# Altium PCB Dionysus LCD PMOD.PcbDoc
Units mil, origin at the board's own origin, x right, y up, seen from the top; angles counter-clockwise.
Board outline 4700.07 x 2700 mil, 4 copper layers (Component Side, V3P3 Plane, Ground Plane, Solder Side); 67 components, 66 nets, 348 pads, 156 vias.
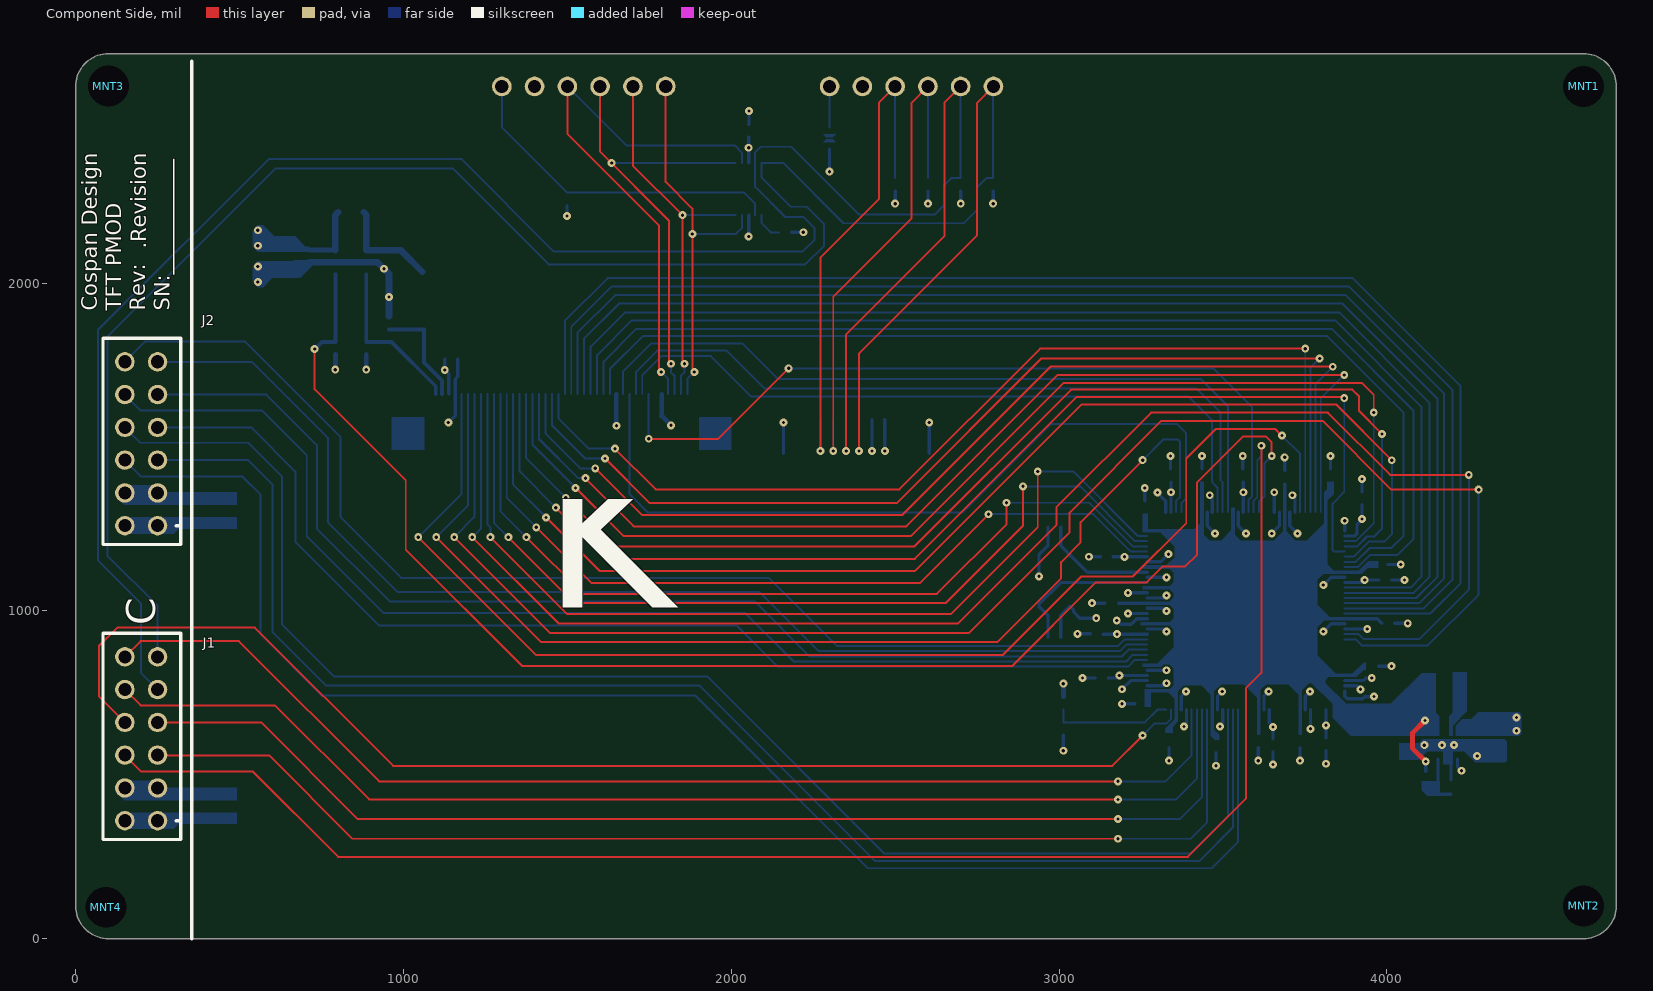
[diagram p0: Component Side view]
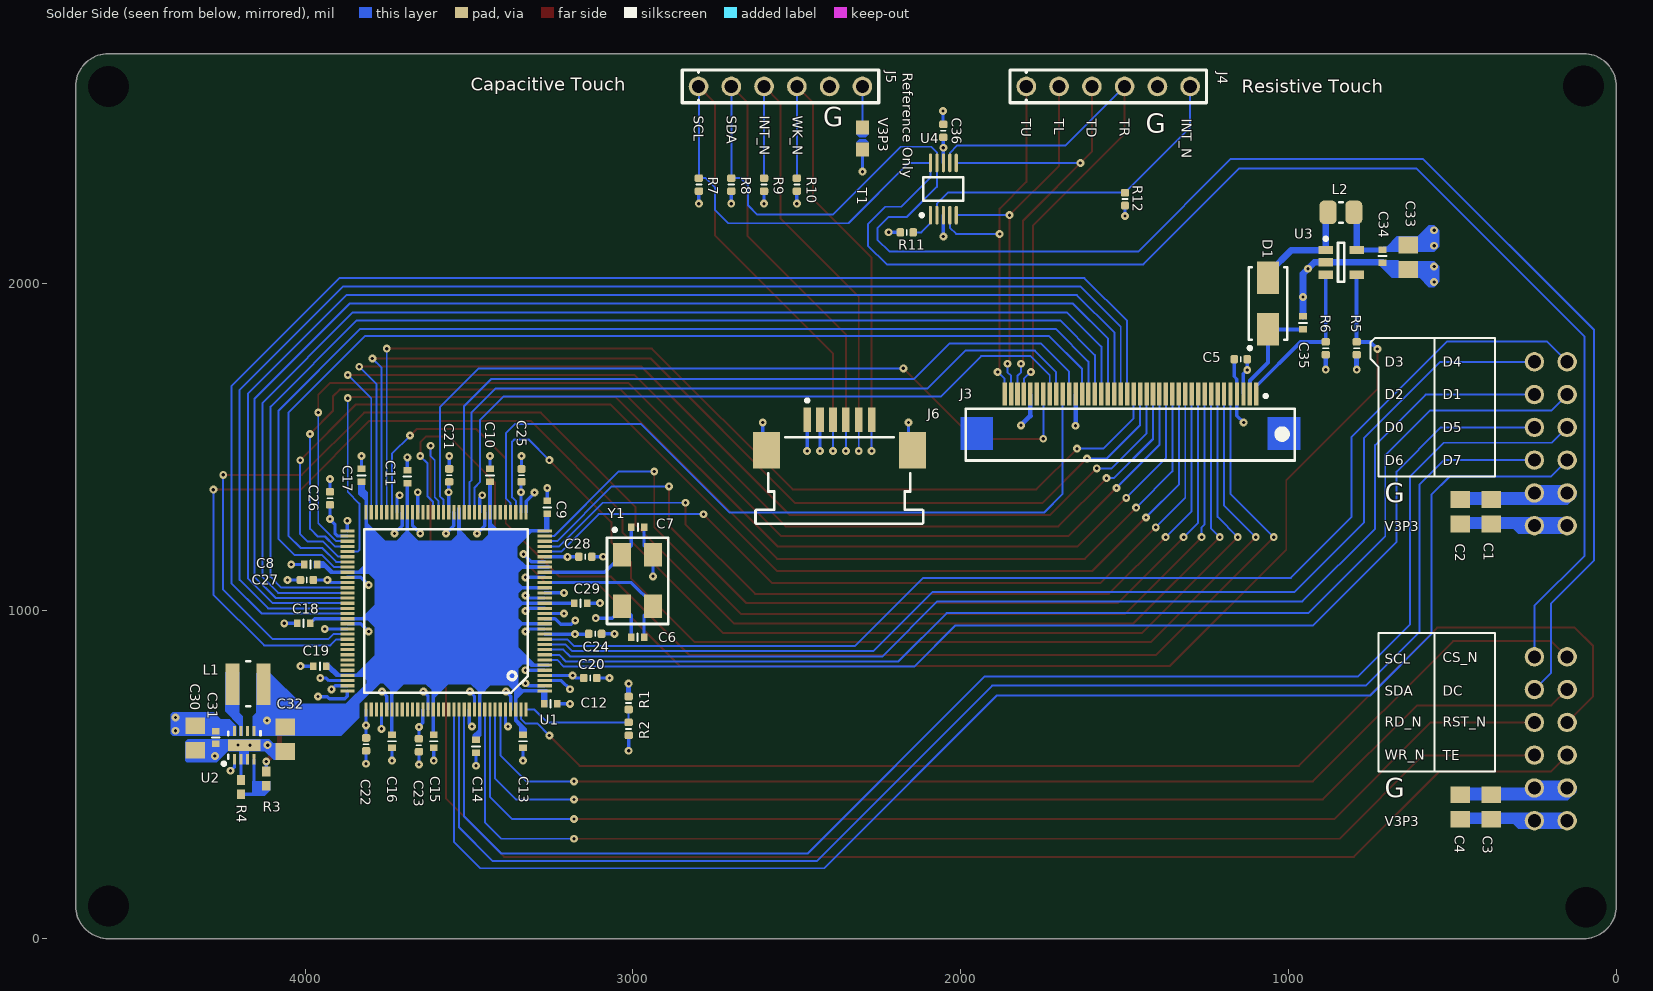
[diagram p1: Solder Side view, seen from below]
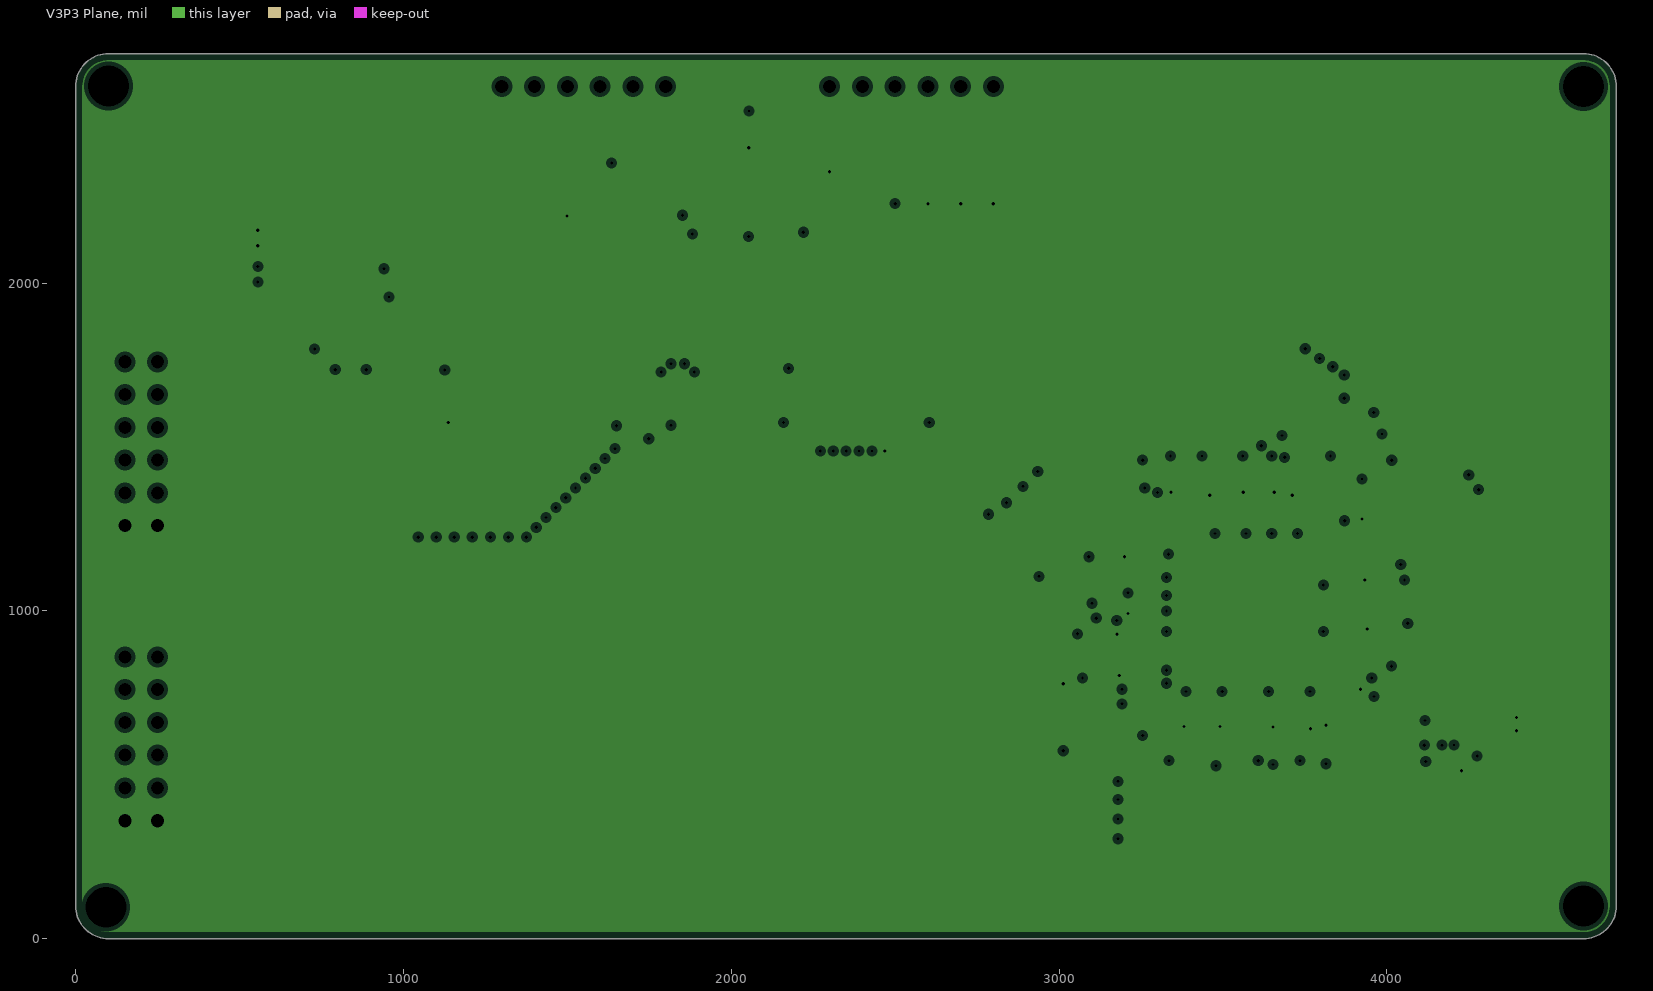
[diagram p2: V3P3 Plane, clearances drawn from the general rule]
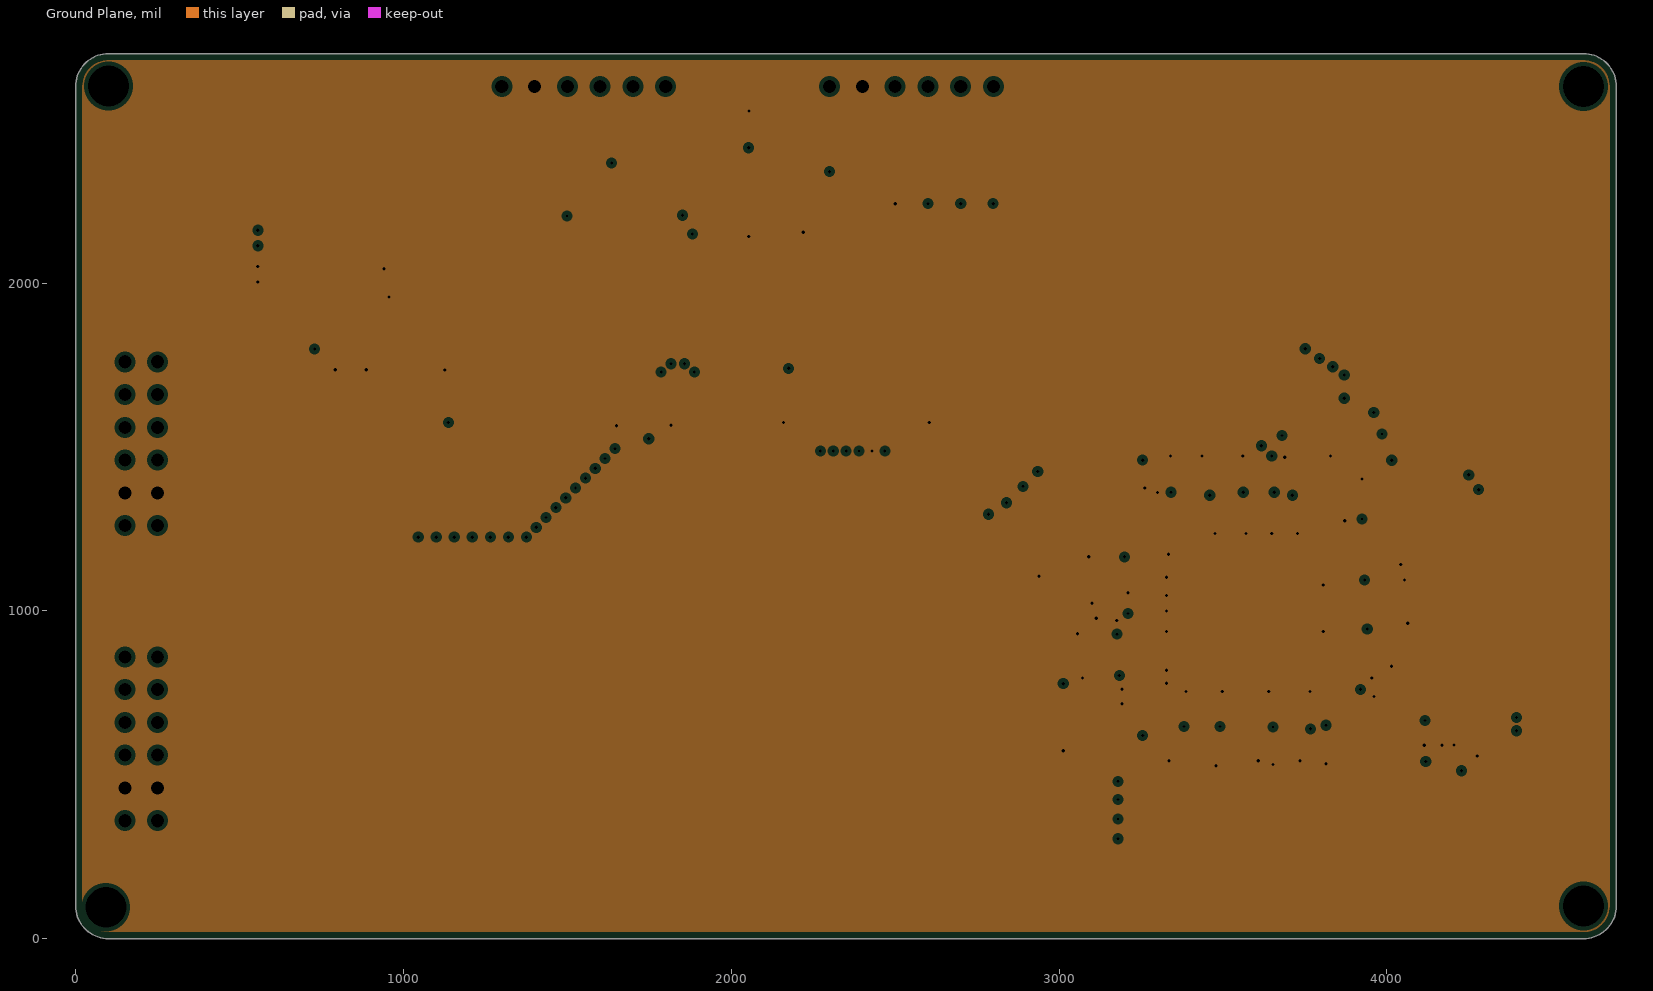
[diagram p3: Ground Plane, clearances drawn from the general rule]
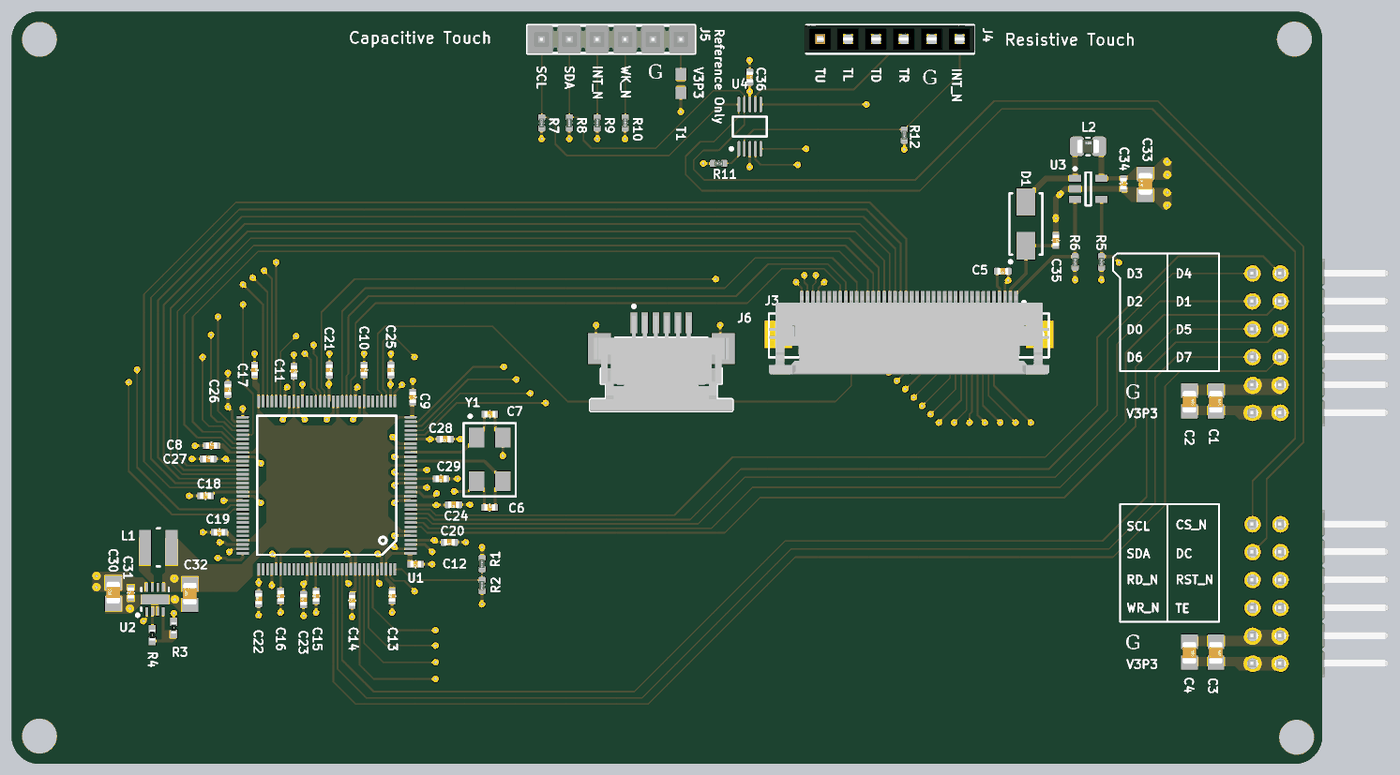
[diagram p4: 3D render of the assembled board from below, using the file's embedded part models]

## Layer stack, top to bottom
Top Solder: solder mask 0.4, Solder Resist, Dk 3.5
Component Side: signal copper 1.4
Dielectric1: core 12.6, FR-4, Dk 4.8
V3P3 Plane: plane copper 1.4, net V3P3
Dielectric2: prepreg 12.6, FR-4, Dk 4.8
Ground Plane: plane copper 1.4, net GND
Dielectric3: core 12.6, FR-4, Dk 4.8
Solder Side: signal copper 1.4
Bottom Solder: solder mask 0.4, Solder Resist, Dk 3.5

## Board outline
0,100 0,2600 cw(c100,2600) 100,2700 4600,2700 4600.07,2700 cw(c4600.07,2600) 4700.07,2600 4700,2600 4700,100 cw(c4600,100) 4600,0 100,0 cw(c100,100)

## Design rules (kind name [scope] priority, off if disabled: settings)
Clearance "Clearance~Sunstone Circuits" [All] p1: gap=5 // Sunstone Circuits Minimum Clearance Rule (MLB~4&6 Layer Designs)
HoleSize "HoleSize~Sunstone Circuits" [All] p1: absolutevalues=TRUE maxlimit=251 minlimit=8 maxpercent=80.000 minpercent=20.000 // Sunstone Circuits Hole Size Rule (MLB~4&6 Layer Designs)
HoleSize Testpoint [All] p2: absolutevalues=TRUE maxlimit=100 minlimit=1 maxpercent=80.000 minpercent=20.000
HoleSize TestPointUsage [All] p3: absolutevalues=TRUE maxlimit=100 minlimit=1 maxpercent=80.000 minpercent=20.000
MinimumAnnularRing "MinimumAnnularRing~Sunstone Circuits" [All] p1: minimumring=7 // Sunstone Circuits Minimum Annular Ring (MLB~4&6 Layer Designs)
MinimumSolderMaskSliver [All] p1: minsoldermaskwidth=1
PlaneClearance "PlaneClearance~Sunstone Circuits" [All] p1: clearance=12 // Sunstone Circuits Power Plane Clearance Rule (MLB~4&6 Layer Designs)
PlaneConnect "PlaneConnect~Sunstone Circuits" [All] p1: planeconnectstyle=Relief reliefexpansion=10 reliefentries=4 reliefconductorwidth=8 reliefairgap=10 // Sunstone Circuits Power Plane Connect Rule (MLB~4&6 Layer Designs)
PolygonConnect "PolygonConnect~Sunstone Circuits" [All] p1: connectstyle=Relief reliefconductorwidth=8 reliefentries=4 polygonreliefangle="90 Angle" airgapwidth=10 // Sunstone Circuits Polygon Connect Style (MLB~4&6 Layer Designs)
RoutingVias "RoutingVias~Sunstone Circuits" [All] p1: holewidth=16 width=30 viastyle="Through Hole" minholewidth=8 minwidth=24 maxholewidth=20 maxwidth=40 // Sunstone Circuits Routing Vias Rule (MLB~4&6 Layer Designs)
ShortCircuit "ShortCircuit~Sunstone Circuits" [All] p1: allowed=FALSE // Sunstone Circuits Short Circuit Rule~Do Not Allow (MLB~4&6 Layer Designs)
SilkToSilkClearance [All] p1: silktosilkclearance=5
SilkToSolderMaskClearance SilkscreenOverComponentPads [IsPad] p1: minsilkscreentomaskgap=1 clearancetoexposedcopper=TRUE
SolderMaskExpansion "SolderMaskExpansion~Sunstone Circuits" [All] p1: expansion=3 // Sunstone Circuits Solder Mask Expansion Rule (MLB~4&6 Layer Designs)
ViasUnderSMD "ViasUnderSMD~Sunstone Circuits" [All] p1: allowed=FALSE // Sunstone Circuits Vias Under SMD~Do Not Allow (MLB~4&6 Layer Designs)
Width "Width~Sunstone Circuits" [All] p1: maxlimit=100 minlimit=6 preferedwidth=10 // Sunstone Circuits Minimum Width Rule (MLB~4&6 Layer Designs)
23 further rules are at their usual default settings.

## Components (designator, comment, footprint, x,y, rotation, side; value= is the part's Value field where it differs from the comment)
C1 "10uF" C_ERA-0805 381.89,1302.36 r270 bottom
C2 "10uF" C_ERA-0805 476.38,1302.36 r270 bottom
C3 "10uF" C_ERA-0805 381.89,401.57 r270 bottom
C4 "10uF" C_ERA-0805 476.38,401.57 r270 bottom
C5 "0.1uF" C_0402 1145.76,1767.9 r0 bottom
C6 "10pF" C_ERA-0402 2985.75,919.69 r180 bottom
C7 "10pF" C_ERA-0402 2985,1255 r0 bottom
C8 "1.0uF" C_ERA-0402 3983.39,1141.73 r180 bottom
C9 "1.0uF" C_ERA-0402 3261.34,1315.75 r270 bottom
C10 "1.0uF" C_ERA-0402 3436.14,1413.39 r270 bottom
C11 "1.0uF" C_ERA-0402 3688.11,1409.45 r270 bottom
C12 "1.0uF" C_ERA-0402 3251.1,716.54 r0 bottom
C13 "1.0uF" C_ERA-0402 3335.35,602.36 r90 bottom
C14 "1.0uF" C_ERA-0402 3478.66,586.61 r90 bottom
C15 "1.0uF" C_ERA-0402 3607.8,602.36 r90 bottom
C16 "1.0uF" C_ERA-0402 3735.35,602.36 r90 bottom
C17 "1.0uF" C_ERA-0402 3828.27,1413.39 r270 bottom
C18 "1.0uF" C_ERA-0402 4004.68,962 r180 bottom
C19 "1.0uF" C_ERA-0402 3955.04,831.49 r180 bottom
C20 "0.1uF" C_0402 3130.31,795.28 r0 bottom
C21 "0.1uF" C_0402 3560.55,1413.39 r270 bottom
C22 "0.1uF" C_0402 3814.09,592.91 r90 bottom
C23 "0.1uF" C_0402 3653,590.31 r90 bottom
C24 "0.1uF" C_0402 3115.31,930 r0 bottom
C25 "0.1uF" C_0402 3340.08,1413.39 r270 bottom
C26 "0.1uF" C_0402 3924.33,1343.56 r270 bottom
C27 "0.1uF" C_0402 3994.69,1094.49 r180 bottom
C28 "0.1uF" C_0402 3145.31,1165.35 r0 bottom
C29 "1.0uF" C_ERA-0402 3159.76,1023.62 r0 bottom
C30 "10uF" C_ERA-0805 4335.5,612.56 r90 bottom
C31 "0.1uF" C_ERA-0402 4272.5,613.87 r90 bottom
C32 "22uF" C_ERA-0805 4060.5,608.54 r90 bottom
C33 "10uF" C_ERA-0805 634.57,2079.27 r90 bottom
C34 "0.1uF" C_ERA-0402 713.31,2082.42 r90 bottom
C35 "C_0402_2.2uF_35V" C_ERA-0402 955.83,1878.69 r270 bottom
C36 "0.1uF" C_0402 2053,2464.69 r270 bottom
D1 "B1100-13-F" DIOM5226X23L 1062.91,1937.74 r90 bottom
J1 "PMOD" "PMOD PERIPHERAL" 250,360 r90 top locked
J2 "PMOD" "PMOD PERIPHERAL" 250,1260 r90 top locked
J3 "Flatlink" FPC_40PIN 1482.38,1557.21 r270 bottom locked
J4 "J_HDR1X6_THRHOLE_VERT_FEMALE" "HDR_1X6 - FEMALE" 1800,2600 r180 bottom
J5 "J_HDR1X6_THRHOLE_VERT" HDR_1X6 2800,2600 r180 bottom
J6 "J_MOLX-52271-0679" MOLX-52271-0679 2370.16,1536.54 r180 bottom locked
L1 "1.0uH" INDNRH1212 4174,776 r180 bottom
L2 "CBC2016T220K" L_0806 840,2216 r180 bottom
MNT1 "Mounting Hole" MNT_4-40#1 4200,2600 r90 top locked
MNT2 "Mounting Hole" MNT_4-40#1 4200,100 r90 top locked
MNT3 "Mounting Hole" MNT_4-40#2 108,2605 r90 top locked
MNT4 "Mounting Hole" MNT_4-40#2 100,100 r90 top
R1 "0.0 Ohms" R_0402 3013,719.06 r270 bottom
R2 "R_0402_10.0K" R_0402 3013,640.31 r270 bottom
R3 "R_0402_64.9K" ERA-0402 4118.5,488.55 r270 bottom
R4 "R_0402_39.2K" ERA-0402 4195.59,462.65 r90 bottom
R5 "R_0402_10.0K" R_0402 792.05,1801.31 r270 bottom
R6 "R_0402_4.99" R_0402 886.54,1801.31 r270 bottom
R7 "2.2k Ohms" R_0402 2799,2300.32 r90 bottom
R8 "2.2k Ohms" R_0402 2700,2300.32 r90 bottom
R9 "R_0402_10.0K" R_0402 2600,2300.32 r90 bottom
R10 "R_0402_10.0K" R_0402 2500,2300.32 r270 bottom
R11 "R_0402_10.0K" R_0402 2164.69,2155 r180 bottom
R12 "2.2k Ohms" R_0402 1499,2256.31 r90 bottom
T1 "Place Solder Bridge to Enable" ERA-0603-SOLDER_JUMPER 2300,2441.54 r90 bottom
U1 "U_SSD1963QL9" LQFP128 3570,1000 r0 bottom locked
U2 "TPS62080" QFN50P200X200X80-8L 4185.75,590.55 r180 bottom
U3 "U_LM3410XMFE" MF05A_N 839.29,2063.52 r180 bottom
U4 "U_TI-ADS1015_1115-10" TI-DGS10_L 2053,2287 r90 bottom
Y1 "Y_SMD_10.00MHZ_10PF" SMD_OSC_8MHZ 2985.75,1092.91 r270 bottom

## Footprints (in the part's own frame and the unit in brackets; to place one, negate y for a bottom-side part, rotate by r counter-clockwise, add the part's x,y. Pads: shape width x height; smd on the part's side, far side on the other; paste and mask are expansions set on the pad)
C_0402 [mm] "Capacitor 0402"
  rrect50% 0.6x0.65 smd: 1(-0.5,0) 2(0.5,0)
  silkscreen extent 0,-0.2 0,0.2, body extent -0.5,-0.3 0.5,0.3, height 0.2
C_ERA-0402 [mm]
  rect 0.5x0.6 smd: 1(-0.5,0) 2(0.5,0)
  silkscreen extent 0,-0.3 0,0.3, body extent -0.5,-0.3 0.5,0.3, height 0.2
C_ERA-0805 [mm]
  rect 1.3x1.5 smd: 1(-0.95,0) 2(0.95,0)
  body extent -0.94,-0.63 1.06,0.63, height 0.78
DIOM5226X23L [mm] "Molded Diode, 2-Leads, Body 5.2x2.6mm, IPC High Density"
  rect 2.5x1.7 smd: 1(2,0) 2(-2,0)
  silkscreen extent -3.57,-1.5 2.8,1.53, body extent -2.8,-1.46 2.79,1.46, height 2.3
ERA-0402 [mm] "Chip Resistor, 2-Leads, Body 1.0x0.5mm, IPC Medium Density"
  rect 0.75x0.65 smd: 1(-0.55,0) 2(0.55,0)
  body extent -0.5,-0.25 0.5,0.25, height 0.33
ERA-0603-SOLDER_JUMPER [mm]
  rect 1.1x1 smd: 1(-0.85,0) 2(0.85,0)
  Component Side region: -0.305,0.483 -0.076,0.254 -0.076,-0.254 -0.305,-0.483
  Component Side region: 0.305,0.483 0.076,0.254 0.076,-0.254 0.305,-0.483
FPC_40PIN [mm] "FPC, 40-Leads, Body"
  rect 1.8x0.35 smd mask+0.06: 1(-2.65,9.75) 7(-2.65,6.75) 8(-2.65,6.25) 9(-2.65,5.75) 10(-2.65,5.25) 11(-2.65,4.75) 12(-2.65,4.25) 13(-2.65,3.75) 14(-2.65,3.25) 15(-2.65,2.75) 16(-2.65,2.25) 17(-2.65,1.75) 18(-2.65,1.25) 19(-2.65,0.75) 20(-2.65,0.25) 21(-2.65,-0.25) 22(-2.65,-0.75) 23(-2.65,-1.25) 24(-2.65,-1.75) 25(-2.65,-2.25) 26(-2.65,-2.75) 27(-2.65,-3.25) 28(-2.65,-3.75) 29(-2.65,-4.25) 30(-2.65,-4.75) 31(-2.65,-5.25) 32(-2.65,-5.75) 33(-2.65,-6.25) 34(-2.65,-6.75) 35(-2.65,-7.25) 36(-2.65,-7.75) 37(-2.65,-8.25) 38(-2.65,-8.75) 39(-2.65,-9.25) 40(-2.65,-9.75)
  rect 1.8x0.32 smd mask+0.06: 2(-2.65,9.25) 3(-2.65,8.75) 4(-2.65,8.25) 5(-2.65,7.75) 6(-2.65,7.25)
  Component Side region: -0.85,13.15 1.65,13.15 1.65,10.65 -0.85,10.65
  Component Side region: -0.85,-10.65 1.65,-10.65 1.65,-13.15 -0.85,-13.15
  silkscreen extent -2.62,-12.75 2.5,12.75, body extent -3.1,-12.73 4.05,12.77, height 2
HDR_1X6 [mil] "HEADER"
  round 60 hole 40: 1(0,0) 2(100,0) 3(200,0) 4(300,0) 5(400,0) 6(500,0)
  silkscreen extent -50,-50 550,50, body extent -50,-50 550,50, height 334
"HDR_1X6 - FEMALE" [mil] "HEADER"
  round 60 hole 40: 1(0,0) 2(100,0) 3(200,0) 4(300,0) 5(400,0) 6(500,0)
  silkscreen extent -50,-50 550,50, body extent -56,-48 554,50, height 340
INDNRH1212 [mm] "WIREWOUND INDUCTOR 3.0X3.0X1.1mm"
  rect 1.1x3.2 smd: 1(-1.2,0) 2(1.2,0)
  silkscreen extent -0.15,-1.7 0.15,1.78, body extent -1.9,-1.55 1.92,1.6, height 1.1
L_0806 [mm] "Inductor 0806"
  rrect50% 1.3x1.8 smd: 1(1,0) 2(-1,0)
  silkscreen extent -0.15,-0.81 0.15,0.79, body extent -1,-0.63 1,0.62, height 0.78
LQFP128 [mm]
  rect 1.1x0.246 smd mask+0.051: 1(-7.65,6.2) 2(-7.65,5.8) 3(-7.65,5.4) 4(-7.65,5) 5(-7.65,4.6) 6(-7.65,4.2) 7(-7.65,3.8) 8(-7.65,3.4) 9(-7.65,3) 10(-7.65,2.6) 11(-7.65,2.2) 12(-7.65,1.8) 13(-7.65,1.4) 14(-7.65,1) 15(-7.65,0.6) 16(-7.65,0.2) 17(-7.65,-0.2) 18(-7.65,-0.6) 19(-7.65,-1) 20(-7.65,-1.4) 21(-7.65,-1.8) 22(-7.65,-2.2) 23(-7.65,-2.6) 24(-7.65,-3) 25(-7.65,-3.4) 26(-7.65,-3.8) 27(-7.65,-4.2) 28(-7.65,-4.6) 29(-7.65,-5) 30(-7.65,-5.4) 31(-7.65,-5.8) 32(-7.65,-6.2) 65(7.65,-6.2) 66(7.65,-5.8) 67(7.65,-5.4) 68(7.65,-5) 69(7.65,-4.6) 70(7.65,-4.2) 71(7.65,-3.8) 72(7.65,-3.4) 73(7.65,-3) 74(7.65,-2.6) 75(7.65,-2.2) 76(7.65,-1.8) 77(7.65,-1.4) 78(7.65,-1) 79(7.65,-0.6) 80(7.65,-0.2) 81(7.65,0.2) 82(7.65,0.6) 83(7.65,1) 84(7.65,1.4) 85(7.65,1.8) 86(7.65,2.2) 87(7.65,2.6) 88(7.65,3) 89(7.65,3.4) 90(7.65,3.8) 91(7.65,4.2) 92(7.65,4.6) 93(7.65,5) 94(7.65,5.4) 95(7.65,5.8) 96(7.65,6.2)
  rect 0.246x1.1 smd mask+0.051: 33(-6.2,-7.65) 34(-5.8,-7.65) 35(-5.4,-7.65) 36(-5,-7.65) 37(-4.6,-7.65) 38(-4.2,-7.65) 39(-3.8,-7.65) 40(-3.4,-7.65) 41(-3,-7.65) 42(-2.6,-7.65) 43(-2.2,-7.65) 44(-1.8,-7.65) 45(-1.4,-7.65) 46(-1,-7.65) 47(-0.6,-7.65) 48(-0.2,-7.65) 49(0.2,-7.65) 50(0.6,-7.65) 51(1,-7.65) 52(1.4,-7.65) 53(1.8,-7.65) 54(2.2,-7.65) 55(2.6,-7.65) 56(3,-7.65) 57(3.4,-7.65) 58(3.8,-7.65) 59(4.2,-7.65) 60(4.6,-7.65) 61(5,-7.65) 62(5.4,-7.65) 63(5.8,-7.65) 64(6.2,-7.65) 97(6.2,7.65) 98(5.8,7.65) 99(5.4,7.65) 100(5,7.65) 101(4.6,7.65) 102(4.2,7.65) 103(3.8,7.65) 104(3.4,7.65) 105(3,7.65) 106(2.6,7.65) 107(2.2,7.65) 108(1.8,7.65) 109(1.4,7.65) 110(1,7.65) 111(0.6,7.65) 112(0.2,7.65) 113(-0.2,7.65) 114(-0.6,7.65) 115(-1,7.65) 116(-1.4,7.65) 117(-1.8,7.65) 118(-2.2,7.65) 119(-2.6,7.65) 120(-3,7.65) 121(-3.4,7.65) 122(-3.8,7.65) 123(-4.2,7.65) 124(-4.6,7.65) 125(-5,7.65) 126(-5.4,7.65) 127(-5.8,7.65) 128(-6.2,7.65)
  silkscreen extent -6.34,-6.34 6.34,6.34
MF05A_N [mm] "SOT23, 5-Leads, Body 2.9x1.6mm, Pitch 0.95mm, Lead Span 2.8mm, IPC Medium Density"
  rect 1.1x0.65 smd: 1(-1.2,0.95) 2(-1.2,0) 3(-1.2,-0.95) 4(1.2,-0.95) 5(1.2,0.95)
  silkscreen extent -1.33,-1.5 0.25,1.95, body extent -0.83,-1.49 0.83,1.5, height 1.19
MNT_4-40#1 [mil]
  round 0 hole 125 mask+1.5: MOUNT(0,-400)
MNT_4-40#2 [mil]
  round 0 hole 125 mask+1.5: MOUNT(-4,8)
MOLX-52271-0679 [mm] "FPC Connector, 6-Leads, Right Angle, Pitch 1.0 mm, Mated Height 3.0 mm, SMT"
  rect 0.6x1.9 smd: 1(-2.5,1.175) 2(-1.5,1.175) 3(-0.5,1.175) 4(0.5,1.175) 5(1.5,1.175) 6(2.5,1.175)
  rect 2.1x2.8 smd: MP1(-5.65,-1.175) MP2(5.65,-1.175)
  silkscreen extent -6.5,-6.87 6.5,2.8, body extent -6.5,-6.87 6.5,1.83, height 3.01
"PMOD PERIPHERAL" [mm] "PMOD Connector"
  round 1.5 hole 1.016: 1(12.7,0) 2(10.16,0) 3(7.62,0) 4(5.08,0) 5(2.54,0) 6(0,0) 7(12.7,2.54) 8(10.16,2.54) 9(7.62,2.54) 10(5.08,2.54) 11(2.54,2.54) 12(0,2.54)
  silkscreen extent -1.45,-1.8 14.53,4.23, body extent -1.24,-0.39 14,12.38, height 6.35
QFN50P200X200X80-8L [mm] "QFN, 8-Leads, Body 2.1x2.1mm (max), Pitch 0.50mm, IPC High Density"
  rect 0.25x0.8 smd mask+0.07: 1(-0.75,-1.1) 2(-0.25,-1.1) 3(0.25,-1.1) 4(0.75,-1.1) 5(0.75,1.1) 6(0.25,1.1) 7(-0.25,1.1) 8(-0.75,1.1)
  rect 2.5x0.9 smd mask+0.07: 9(0,0)
  silkscreen extent -1.71,-1.56 1.26,1.06, body extent -1.05,-1.05 1.05,1.05, height 0.8
R_0402 [mm] "Resistor 0402"
  rrect50% 0.6x0.65 smd: 1(-0.5,0) 2(0.5,0)
  silkscreen extent 0,-0.2 0,0.2, body extent -0.51,-0.25 0.51,0.25, height 0.51
SMD_OSC_8MHZ [mm]
  rect 1.8x1.4 smd: 1(-2,-1.2) 2(2,-1.2) 3(2,1.2) 4(-2,1.2)
  silkscreen extent -4.05,-2.37 3.37,2.37, body extent -2.9,-2 2.9,2, height 1.7
TI-DGS10_L [mm] "SOP, 10-Leads, Body 3.1x3.1mm, Pitch 0.5mm, IPC High Density"
  oval 1.45x0.25 smd: 1(-2.025,1) 2(-2.025,0.5) 3(-2.025,0) 4(-2.025,-0.5) 5(-2.025,-1) 6(2.025,-1) 7(2.025,-0.5) 8(2.025,0) 9(2.025,0.5) 10(2.025,1)
  silkscreen extent -2.15,-1.55 0.9,1.8, body extent -1.55,-1.55 1.55,1.55, height 1.1

## Part data
C1 C2 C3 C4 C30 C33: library part C_0805_10UF_6.3V, "CAP CER 10UF 6.3V X7R 10% 0805"
C5 C20 C21 C22 C23 C24 C25 C26 C27 C28 C31 C34 C36: library part C_0402_0.1UF_16V, "CAP CER .10UF 16V X7R 0402"
C6 C7: library part C_0402_10PF_50V, "CAP CER 10PF 50V NP0 0402"
C8 C9 C10 C11 C12 C13 C14 C15 C16 C17 C18 C19 C29: library part C_0402_1.0UF_16V, "CAP CER 1.0UF 16V X5R 0402"
C32: library part C_0805_22UF_6.3V, "CAP CER 22UF 6.3V X7R 10% 0805"
C35: "CAP CER 2.2UF 35V 20% X5R 0402"
D1: library part D_SCHOTT_B1100-13-F, "DIODE SCHOTTKY 100V 1A SMA"
J1 J2: library part J_PMOD_PERIPH, "CONN HEADER 12PS .100 DL R/A TIN"
J3: library part J_FPC_MOLEX_40POS_TOP, "CONN FFC/FPC .50MM 40POS R/A SMD"
J4: "CONN HEADER FEMALE 6POS .1\" TIN"
J5: "CONN HEADER .100\" 12POS TIN PCB"
J6: "CONN FFC 6POS 1MM R/A ZIF SMD"
L1: library part L_1.0UH_1.62A, "INDUCTOR POWER 1.0UH 1620MA 1212"
L2: library part L_0806_22uH, "INDUCTOR 22UH 10% 0806 SMD"
MNT1 MNT2 MNT3 MNT4: library part MNT_440_HOLE
R1: library part R_0402_0.00, "RES 1.00 OHM 1/16W 1% 0402 SMD"
R2 R5 R9 R10 R11: "RES 10.0K OHM 1/16W 1% 0402 SMD"
R3: "RES 64.9K OHM 1/16W 1% 0402 SMD"
R4: "RES 39.2K OHM 1/16W 1% 0402 SMD"
R6: "RES 4.99 OHM 1/16W 1% 0402"
R7 R8 R12: library part R_0402_2.2K, "RES 2.20K OHM 1/10W 1% 0402 SMD"
T1: library part T_0603_JUMPER_PAD, "SOLDER_JUMPER PAD"
U1: "SSD1963QL9"
U2: library part U_TPS62080, "IC BUCK SYNC ADJ 1.2A 8WSON"
U3: "IC DRVR WT/OLED BCKLT SOT23-5"
U4: "IC ADC 12BIT I2C W/REF 10-MSOP"
Y1: "CRYSTAL 10MHZ 10PF SMD"

## Via types
v1: diameter 24, hole 10, Component Side to Solder Side, tented top, 156 vias

## Nets (pads, with @x,y where several pads share a name; then routed paths per layer and width w, separated by ;. In a path a pad name is that pad's centre, name@x,y a point inside that pad or via, vN(x,y) a via of type N, cw(c..) or ccw(c..) an arc to the next point about the centre after c; other vN are vias at no path point)
CONF: R1.2 R2.1 U1.128 | length 368.4
  Solder Side w6: R1.2 R2.1 3261.5,660 3300.32,698.82 U1.128
CS_N: J1.7 U1.123 | length 3624
  Component Side w6: J1.7 198,908 498,908 926,480 v1(3180,480)
  Solder Side w6: v1(3180,480) 3325,480 3404.65,559.65 U1.123
D0: J2.3 U1.7 | length 3455.1
  Solder Side w6: J2.3 535,1560 670,1425 670,1211 925,956 2016,956 2142.08,829.92 3210.94,829.92 3231.42,850.39 U1.7
D1: J2.8 U1.8 | length 3609.3
  Solder Side w6: J2.8 199,1611 569,1611 705,1475 705,1228 940,993 2043,993 2190.33,845.67 3204.65,845.67 3225.12,866.14 U1.8
D2: J2.2 U1.9 | length 3507.5
  Solder Side w6: J2.2 582,1660 736,1506 736,1251 958,1029 2071,1029 2238.58,861.42 3192.05,861.42 3212.52,881.89 U1.9
D3: J2.1 U1.10 | length 3544.1
  Solder Side w6: J2.1 537,1760 770,1527 770,1269 981,1058 2086,1058 2266.83,877.17 3185.75,877.17 3206.22,897.64 U1.10
D4: J2.7 U1.11 | length 3680.8
  Solder Side w6: J2.7 212,1822 516,1822 808,1530 808,1286 993,1101 2115,1101 2323.09,892.91 3179.45,892.91 3199.92,913.39 U1.11
D5: J2.9 U1.116 | length 4540.2
  Solder Side w6: J2.9 197,1513 526,1513 630,1409 630,958 788,800 1927,800 2467,260 3402,260 3514.88,372.88 U1.116
D6: J2.4 U1.115 | length 4452.5
  Solder Side w6: J2.4 526,1460 600,1386 600,936 764,772 1904,772 2439,237 3428,237 3530.63,339.63 U1.115
D7: J2.10 U1.114 | length 4598.4
  Solder Side w6: J2.10 200,1410 509,1410 564,1355 564,929 751,742 1890,742 2417,215 3466,215 3546.38,295.38 U1.114
DC: J1.8 U1.122 | length 3646
  Component Side w6: J1.8 198,712 608,712 895,425 v1(3180,425)
  Solder Side w6: v1(3180,425) 3357.2,425 3420.39,488.19 U1.122
GND: C1.1 C2.1 C3.1 C4.1 C5.1 C6.1 C7.1 C8.1 C9.1 C10.1 C11.1 C12.1 C13.1 C14.1 C15.1 C16.1 C17.1 C18.1 C19.1 C20.1 C21.1 C22.1 C23.1 C24.1 C25.1 C26.1 C27.1 C28.1 C29.1 C30.1 C31.1 C32.1 C33.1 C34.1 C35.1 C36.1 J1.5 J1.11 J2.5 J2.11 J3.3 J3.29 J3.36 J4.5 J5.5 J6.2 J6.MP1 J6.MP2 R2.2 R4.2 R5.2 R6.2 R10.2 R11.1 U1.2 U1.3 U1.5 U1.13 U1.15 U1.17 U1.19 U1.20 U1.23 U1.26 U1.33 U1.41 U1.47 U1.55 U1.57 U1.65 U1.74 U1.83 U1.94 U1.96 U1.101 U1.109 U1.118 U1.125 U2.2 U2.3 U2.9 U3.2 U4.3 Y1.2 Y1.4 | length 4280.2
  Solder Side w10: C5.1 v1(1126.08,1735) 1137.89,1723.19 J3.3 ; v1(2053,2142) U4.3 ; C36.1 2054,2485.37 v1(2054,2525) ; J6.MP2@2159.21,1480.17 v1(2159.21,1574.91) ; R11.1 v1(2220,2155) ; v1(2429.21,1488.06) J6.2 ; v1(2500,2242.54) R10.2 ; J6.MP1@2604.09,1480.17 v1(2604.09,1574.91) ; v1(2938.5,1105.51) Y1.4 2966.06,1199.21 C7.1@2966.06,1255 ; C6.1 3005.43,986.61 Y1.2 3044.02,1003.15 3044.02,996.85 3062.91,977.95 v1(3113.31,977.95) ; v1(3013,573.39) R2.2 ; v1(3056.26,930) C24.1 ; v1(3071.26,795.28) C20.1 ; v1(3091,1165.35) C28.1 ; v1(3100.71,1023.62) C29.1 ; v1(3176,971) 3188,959 3220.34,959 3237.72,976.38 U1.15 ; v1(3191.84,761.21) 3218.03,787.4 U1.3 ; v1(3192.05,716.54) C12.1 ; v1(3210.16,1055.12) U1.20 ; C9.1 v1(3261.34,1374.8) ; U1.2 3319.61,771.65 v1(3327.48,779.53) ; U1.5 v1(3327.48,818.9) ; U1.13 3319.61,944.88 v1(3327.48,937.01) ; U1.17 3319.61,1007.87 v1(3327.48,1000) ; U1.19 3319.61,1039.37 v1(3327.48,1047.24) ; U1.23 v1(3327.48,1102.36) ; U1.26 3310.16,1149.61 v1(3333.78,1173.23) ; v1(3300,1361) 3325.91,1335.09 U1.33 ; v1(3335.35,543.31) C13.1 ; C25.1 v1(3340.08,1472.44) ; U1.125 3373.15,740.16 v1(3387.32,754.33) ; C10.1 v1(3436.14,1472.44) ; U1.41 3451.89,1259.84 v1(3475.51,1236.22) ; v1(3478.66,527.56) C14.1 ; U1.118 3483.39,740.16 v1(3497.56,754.33) ; U1.47 3546.38,1259.84 v1(3570,1236.22) ; C21.1 v1(3560.55,1472.44) ; v1(3607.8,543.31) C15.1 ; U1.109 3625.12,740.16 v1(3639.29,754.33) ; v1(3648.74,1236.22) 3672.36,1259.84 U1.55 ; v1(3653,531.26) C23.1 ; C11.1 v1(3688.11,1468.5) ; U1.57 3703.86,1259.84 v1(3727.48,1236.22) ; v1(3735.35,543.31) C16.1 ; U1.101 3751.1,740.16 v1(3765.28,754.33) ; v1(3806.22,937.01) 3829.84,960.63 U1.83 ; v1(3806.22,1078.74) 3829.84,1102.36 U1.74 ; v1(3814.09,533.86) C22.1 ; C17.1 v1(3828.27,1472.44) ; U1.96 3871.18,739.76 3878.66,732.28 3925.91,732.28 3932.2,738.58 v1@3961,738.58 ; U1.94 3927.48,787.4 3935.35,795.28 v1(3954,795.28) ; U1.65 v1(3871.18,1275.2) ; C26.1 v1(3924.33,1402.61) ; C19.1 v1(4014.09,831.49) ; C8.1 v1(4042.44,1141.73) ; C27.1 v1(4053.74,1094.49) ; C18.1 v1(4063.74,962) ; R4.2 U2.2
  Solder Side w14: v1(1649.7,1564.87) J3.29 ; 1787.5,1595.09 J3.36
  Solder Side w15: v1(792.05,1735.96) R5.2 ; v1(886.54,1735.96) R6.2 ; 1787.5,1595.09 v1(1816.38,1566.21)
  Solder Side w20: C34.1@713.31,2063.52 921.18,2063.52 955.83,2028.87 C35.1
  other v1: 4275.5,557.55 4114.5,590.55 4168.43,590.55 4204.65,590.94 3961,738.74 955.83,1958 555.83,2003.68 940.7,2044 555.83,2050.92
GPIO0: J3.31 U1.36 | length 2397
  Solder Side w6: J3.31 1689.07,1356.93 1746,1300 2705,1300 2975,1570 3360,1570 3387.32,1542.68 3387.32,1343.31 3373.15,1329.13 U1.36
INT_N: J5.3 J6.5 R9.2 | length 1606.3
  Component Side w6: v1(2311.1,1488.06) 2311.1,1959.1 2550,2198 2550,2550 J5.3
  Solder Side w6: v1(2311.1,1488.06) J6.5 ; R9.2 J5.3
LDATA0: J3.21 U1.81 | length 4139.2
  Solder Side w6: J3.21 1492.22,1884.69 1622.54,2015 3895.56,2015 4225,1685.56 4225,1085 4132.13,992.13 U1.81
LDATA1: J3.22 U1.80 | length 4018.8
  Solder Side w6: J3.22 1511.91,1866.91 1634.29,1989.29 3884.91,1989.29 4200,1674.19 4200,1095 4112.87,1007.87 U1.80
LDATA2: J3.23 U1.79 | length 3901.5
  Solder Side w6: J3.23 1531.59,1849.59 1645.57,1963.57 3874.26,1963.57 4175,1662.83 4175,1100 4098.62,1023.62 U1.79
LDATA3: J3.24 U1.78 | length 3790.9
  Solder Side w6: J3.24 1551.28,1831.28 1657.86,1937.86 3863.6,1937.86 4155,1646.46 4155,1104.84 4089.53,1039.37 U1.78
LDATA4: J3.25 U1.77 | length 3672
  Solder Side w6: J3.25 1570.96,1805.96 1676,1911 3854.1,1911 4130,1635.1 4130,1103 4082.12,1055.12 U1.77
LDATA5: J3.26 U1.76 | length 3554
  Solder Side w6: J3.26 1590.65,1780.65 1696.43,1886.43 3842.3,1886.43 4105.43,1623.3 4105.43,1103.94 4072.36,1070.87 U1.76
LDATA6: J3.27 U1.72 | length 3351.8
  Solder Side w6: J3.27 1610.33,1760.33 1710.71,1860.71 3831.65,1860.71 4081,1611.37 4081,1219.03 4032.89,1170.93 3948.8,1170.93 3911.73,1133.86 U1.72
LDATA7: J3.28 U1.71 | length 3224.9
  Solder Side w6: J3.28 1630.02,1738.02 1731,1839 3817,1839 4051,1605 4051,1229 4014,1192 3947.83,1192 3905.43,1149.61 U1.71
LDATA8: J3.13 U1.70 | length 3744.6
  Component Side w6: v1(1435,1285) 1598,1122 2561,1122 3069,1630 3844.84,1630 v1(4015,1459.84)
  Solder Side w6: J3.13 1334.74,1385.26 v1(1435,1285) ; U1.70 3899.13,1165.35 3945.78,1212 3993,1212 4015,1234 v1(4015,1459.84)
LDATA9: J3.14 U1.69 | length 3583.8
  Component Side w6: v1(1465,1315) 1621,1159 2560,1159 3053,1652 3867,1652 v1(3870,1649)
  Solder Side w6: J3.14 1354.43,1425.57 v1(1465,1315) ; v1(3870,1649) 3870,1362.99 3834.57,1327.56 3834.57,1185.83 3839.29,1181.1 U1.69
LDATA10: J3.15 U1.68 | length 3624
  Component Side w6: v1(1495,1345) 1643,1197 2559,1197 3037,1675 3895,1675 3915,1655 3915,1610 v1(3985,1540)
  Solder Side w6: J3.15 1374.11,1465.89 v1(1495,1345) ; U1.68 3909.24,1196.85 3939.39,1227 3962,1227 3985,1250 v1(3985,1540)
LDATA11: J3.16 U1.67 | length 3549.5
  Component Side w6: v1(1525,1375) 1672,1228 2547,1228 3015,1696 3924,1696 3960,1660 v1(3960,1605)
  Solder Side w6: J3.16 1393.8,1506.2 v1(1525,1375) ; U1.67 3904.98,1212.6 3960,1267.62 v1(3960,1605)
LDATA12: J3.17 U1.63 | length 3343.8
  Component Side w6: v1(1555,1405) 1702,1258 2534,1258 2996,1720 v1(3870,1720)
  Solder Side w6: J3.17 1413.48,1524.52 1533,1405 v1(1555,1405) ; U1.63 3798.35,1648.35 v1(3870,1720)
LDATA13: J3.18 U1.62 | length 3278.2
  Component Side w6: v1(1585,1435) 1728,1292 2520.87,1292 2973.87,1745 v1(3835,1745)
  Solder Side w6: J3.18 1433.17,1541.83 1540,1435 v1(1585,1435) ; U1.62 3782.6,1692.6 v1(3835,1745)
LDATA14: J3.19 U1.61 | length 3198.3
  Component Side w6: v1(1615,1465) 1751,1329 2505,1329 2946,1770 v1(3795,1770)
  Solder Side w6: J3.19 1452.85,1567.15 1555,1465 v1(1615,1465) ; U1.61 3766.85,1741.85 v1(3795,1770)
LDATA15: J3.20 U1.60 | length 3119
  Component Side w6: v1(1645,1495) 1769,1371 2513,1371 2942,1800 v1(3751.1,1800)
  Solder Side w6: 1472.54,1587 J3.20 ; 1472.77,1587.23 1565,1495 v1(1645,1495) ; U1.60 v1(3751.1,1800)
LDATA16: J3.5 U1.59 | length 3940.9
  Component Side w6: v1(1045,1225) 1404,866 2829,866 3068,1105 3225,1105 3388,1268 3388,1465 3478,1555 3660,1555 v1(3680,1535)
  Solder Side w6: v1(1045,1225) 1177.26,1357.26 J3.5 ; v1(3680,1535) 3735.35,1479.65 U1.59
LDATA17: J3.6 U1.35 | length 3421.3
  Component Side w6: v1(1100,1225) 1420,905 2811,905 3006,1100 3006,1149 3066,1209 3066,1271 v1(3255.04,1460)
  Solder Side w6: v1(1100,1225) 1196.94,1321.94 J3.6 ; v1(3255.04,1460) 3318.04,1523 3362,1523 3368.43,1516.57 3368.43,1346.46 3357.4,1335.43 U1.35
LDATA18: J3.7 U1.86 | length 4899.6
  Component Side w6: v1(1155,1225) 1448,932 2724,932 3032,1240 3032,1300 3312,1580 3804,1580 4014,1370 v1(4280,1370)
  Solder Side w6: v1(1155,1225) 1216.63,1286.63 J3.7 ; U1.86 3904.61,913.39 3923,895 4125,895 4280,1050 v1(4280,1370)
LDATA19: J3.8 U1.85 | length 4770.7
  Component Side w6: v1(1210,1225) 1473,962 2692,962 2992,1262 2992,1316 3281,1605 3820,1605 4010,1415 v1(4250,1415)
  Solder Side w6: v1(1210,1225) 1236.32,1251.31 J3.8 ; U1.85 3913.87,929.13 3929,914 4099,914 4250,1065 v1(4250,1415)
LDATA20: J3.9 U1.31 | length 2902.7
  Component Side w6: v1(1265,1225) 1500,990 2670,990 2935,1255 v1(2935,1425)
  Solder Side w6: J3.9 1256,1264 1265,1255 v1(1265,1225) ; v1(2935,1425) 3044.21,1425 3240.87,1228.35 U1.31
LDATA21: J3.10 U1.30 | length 2774.4
  Component Side w6: v1(1320,1225) 1521.38,1023.62 2653.62,1023.62 2890,1260 v1(2890,1380)
  Solder Side w6: J3.10 1275.69,1269.31 v1(1320,1225) ; v1(2890,1380) 3064.02,1380 3231.42,1212.6 U1.30
LDATA22: J3.11 U1.29 | length 2643.4
  Component Side w6: v1(1375,1225) 1548,1052 2627,1052 2840,1265 v1(2840,1330)
  Solder Side w6: J3.11 1295.37,1304.63 v1(1375,1225) ; v1(2840,1330) 3091.97,1330 3225.12,1196.85 U1.29
LDATA23: J3.12 U1.28 | length 2512.2
  Component Side w6: v1(1405,1255) 1575,1085 2575,1085 v1(2785,1295)
  Solder Side w6: J3.12 1315.06,1344.94 v1(1405,1255) ; v1(2785,1295) 3104.92,1295 3218.82,1181.1 U1.28
LDEN: J3.34 U1.49 | length 2445.9
  Component Side w6: v1@1742.13,1525.13 1960.13,1525.13 v1(2175,1740)
  Solder Side w6: v1(1748.13,1525.13) J3.34 ; v1(2175,1740) 3470,1740 3588.9,1621.1 3588.9,1349.61 3577.87,1338.58 U1.49
LED+: C35.2 D1.2 J3.2 | length 327.4
  Solder Side w12: C35.2 D1.2 1062.91,1758.09 1118.2,1702.8 J3.2
LED-: J3.1 R6.1 U3.3 | length 497.2
  Solder Side w12: U3.3 R6.1 963,1821 1098.52,1685.48 J3.1
LFRAME: J3.33 U1.43 | length 2187.9
  Solder Side w6: J3.33 1728.44,1718.44 1787,1777 1938,1777 2061.46,1653.54 3395.2,1653.54 3466.06,1582.68 3466.06,1393.7 3483.39,1376.38 U1.43
LLINE: J3.32 U1.44 | length 2263.1
  Solder Side w6: J3.32 1708.76,1728.76 1774,1794 1986,1794 2101,1679 3419,1679 3492,1606 3492,1399.26 3499.13,1392.13 U1.44
LSHIFT: J3.30 U1.45 | length 2352.2
  Solder Side w6: J3.30 1669.39,1729.39 1756,1816 2034,1816 2143,1707 3433,1707 3514.88,1625.12 U1.45
NetC6_2: C6.2 U1.22 Y1.3 | length 469.9
  Solder Side w6: Y1.3 Y1.3@2938.5,1020.47
  Solder Side w10: Y1.3 2966.06,986.61 C6.2 ; Y1.3@2938.5,1020.47 3004.65,1086.61 U1.22
NetC7_2: C7.2 U1.24 Y1.1 | length 360.7
  Solder Side w6: Y1.1@3032.99,1165.35 Y1.1 ; U1.24@3267.69,1116.98 U1.24
  Solder Side w10: C7.2@3005.43,1255 3005.43,1199.21 Y1.1 3086.54,1118.11 U1.24
NetD1_1: D1.1 L2.2 U3.1 | length 315.9
  Solder Side w20: L2.2 886.54,2208.83 U3.1 991.17,2100.92 D1.1@1057.09,2035
NetJ4_6: J4.6 R12.2 U4.2 | length 1029.4
  Solder Side w6: J4.6 1300,2475 R12.2 2039.46,2276 2072.69,2242.77 U4.2
NetJ5_6: J5.6 T1.2 | length 125
  Solder Side w6: T1.2 J5.6
NetL1_1: L1.1 U2.7
NetR3_2: R3.2 R4.1 U2.4 | length 145.6
  Solder Side w10: U2.4 4156.22,440.55 R4.1@4195.15,440.55
NetR11_2: R11.2 U4.1 | length 88.7
  Solder Side w6: U4.1 2092.37,2182.63 2120,2155 R11.2
PWM: R5.1 U1.51 U3.4 | length 4449.3
  Component Side w6: v1(729.06,1798.95) 729.06,1675.94 1007,1398 1007,1187 1362,832 2857,832 3112,1087 3267,1087 3316,1136 3385,1136 3421,1172 3421,1392 3561,1532 3632,1532 3648.74,1515.26 v1(3648.74,1472.44)
  Solder Side w6: U1.51 3609.37,1332.28 3626.69,1349.61 3626.69,1450.39 v1(3648.74,1472.44)
  Solder Side w12: v1(729.06,1798.95) 751.1,1821 R5.1 U3.4
RD_N: J1.3 U1.121 | length 3602.3
  Component Side w6: J1.3 566,660 861,365 v1(3180,365)
  Solder Side w6: v1(3180,365) 3368.07,365 3436.14,433.07 U1.121
RESET_N: J1.9 U1.127 | length 3821.5
  Component Side w6: J1.9 71,739 71,893 127,949 547,949 968.44,527.56 3162.56,527.56 v1(3255,620)
  Solder Side w6: v1(3255,620) 3292.09,657.09 3327.87,657.09 3341.65,670.87 U1.127
SCL: J1.1 J5.1 J6.3 R7.2 U4.10 | length 6479.1
  Component Side w6: v1(2389.84,1488.06) 2389.84,1785.84 2750,2146 2750,2550 J5.1
  Solder Side w6: J1.1 250,1015.53 97,1168.53 97,1837 610,2350 1150,2350 1443,2057 2225.48,2057 2283,2114.52 2283,2180 2230,2233 2181,2233 2092.37,2321.63 U4.10 2158.28,2366.72 2342.37,2182.63 2708.63,2182.63 2750,2224 2750,2292 2778,2320 R7.2 J5.1@2799,2599 ; v1(2389.84,1488.06) J6.3
SDA: J1.2 J5.2 J6.4 R8.2 U4.9 | length 6529.1
  Component Side w6: v1(2350.47,1488.06) 2350.47,1843.47 2650,2143 2650,2550 J5.2 J5.2@2685,2600
  Solder Side w6: J1.2 200,810 200,1022 68,1154 68,1857 590,2379 1176,2379 1459,2096 2217,2096 2254,2133 2254,2168 2220,2202 2164,2202 2072.69,2293.31 U4.9 2072.69,2398.69 2090,2416 2183,2416 2390,2209 2621,2209 2649,2237 2649,2298 2671,2320 R8.2 J5.2 ; v1(2350.47,1488.06) J6.4
TE: J1.10 U1.50 | length 4930.8
  Component Side w6: J1.10 200,510 541,510 801,250 3393,250 3570,427 3570,763.78 3617.24,811.02 v1(3617.24,1503.94)
  Solder Side w6: U1.50 3593.62,1335.43 3604.65,1346.46 3604.65,1459.84 3617.24,1472.44 v1(3617.24,1503.94)
TPD: J3.38 J4.3 U4.6 | length 1417.4
  Component Side w6: J4.3 1600,2401 1810,2191 v1@1810,1745
  Solder Side w6: v1(1635,2366.72) U4.6 ; v1(1816,1753.87) 1816,1727.87 1826.87,1717 J3.38
TPL: J3.39 J4.2 U4.5 | length 1177.2
  Component Side w6: J4.2 1700,2358.28 1851.42,2206.86 v1@1851.42,1745
  Solder Side w6: J3.39 1846.55,1717 1857.42,1727.87 v1(1857.42,1753.87) ; v1(1851,2207.28) U4.5
TPR: J3.37 J4.4 U4.7 | length 1719.6
  Component Side w6: J4.4 1500,2455 1780,2175 v1@1780,1720
  Solder Side w6: J4.4 1680,2420 2010,2420 2033.32,2396.68 U4.7 ; v1(1786,1728.87) 1807.18,1707.69 J3.37
TPU: J3.40 J4.1 U4.4 | length 1187.7
  Component Side w6: J4.1 1800,2309 1881.42,2227.58 v1@1881.42,1720
  Solder Side w6: J3.40 1866.24,1707.69 v1(1887.42,1728.87) ; v1(1881.42,2150) 2014,2150 2033.32,2169.32 U4.4
V1P2: C8.2 C9.2 C10.2 C11.2 C12.2 C13.2 C14.2 C15.2 C16.2 C17.2 C18.2 C19.2 C29.2 C32.2 L1.2 R3.1 U1.1 U1.6 U1.14 U1.18 U1.21 U1.25 U1.32 U1.40 U1.46 U1.56 U1.64 U1.73 U1.82 U1.93 U1.102 U1.110 U1.119 U1.126 U2.5 | length 241.9
  Component Side w15: v1(4116.5,665.55) 4078,627.06 4078,581.05 v1(4118.5,540.55)
  Solder Side w10: 3937,976 3971,976 C18.2 ; R3.1 v1(4118.5,540.55)
V3P3: C1.2 C2.2 C3.2 C4.2 C5.2 C20.2 C21.2 C22.2 C23.2 C24.2 C25.2 C26.2 C27.2 C28.2 C30.2 C31.2 C33.2 C34.2 C36.2 J1.6 J1.12 J2.6 J2.12 J3.4 J6.1 L2.1 R1.1 R7.1 R8.1 R9.1 R12.1 T1.1 U1.4 U1.12 U1.16 U1.27 U1.34 U1.42 U1.48 U1.54 U1.58 U1.66 U1.75 U1.84 U1.95 U1.97 U1.100 U1.108 U1.117 U1.124 U2.1 U2.8 U3.5 U4.8 | length 2351.3
  Solder Side w10: v1(1137,1575) 1157.57,1595.57 1157.57,1707.27 1165.45,1715.14 C5.2 ; v1(1499,2205) R12.1 ; U4.8 C36.2 ; v1(2300,2340) T1.1 ; v1(2468.58,1488.06) J6.1 ; v1(2600,2242.54) R9.1 ; v1(2700,2242.54) R8.1 ; v1(2799,2242.54) R7.1 ; C24.2@3135,929.13 U1.12 ; C20.2 3175.28,795.28 3183.15,803.15 U1.4 ; C28.2 U1.27 ; v1(3210.16,992.13) U1.16 ; U1.34 C25.2@3341.65,1392.13 ; v1(3381.02,647.24) 3388.9,655.12 U1.124 ; v1(3459.76,1352.76) 3467.64,1344.88 U1.42 ; v1(3491.26,647.24) 3499.13,655.12 U1.117 ; U1.48 C21.2@3562.13,1392.13 ; U1.108 3640.87,658.27 v1(3652.93,646.2) C23.2@3652.93,610 ; U1.54 v1(3656.61,1362.2) ; v1(3711.73,1352.76) 3719.61,1344.88 U1.58 ; v1(3766.85,640.16) U1.100 ; C22.2 U1.97 ; U1.95 3908.58,771.65 v1(3919.61,760.63) ; U1.84 v1@3940,944.88 ; U1.75 3924.33,1086.61 v1(3932.2,1094.49) C27.2 ; U1.66 3900.78,1228.35 3909,1236.57 3909,1264.98 v1(3924.33,1280.32) C26.2 ; U2.1 4215.28,524.77 v1(4227.5,512.55)
  Solder Side w15: C34.2@713.31,2100.92 U3.5 ; R1.1 v1(3013,778.11)
  Solder Side w20: U3.5 792.05,2207.42 L2.1
  other v1: 4395.5,634.55 3814.09,651 4395.5,674.55 3184,803.15 3177,929.13 3940,945 3199.92,1165 3341.65,1362.2 3562.13,1362.2 555.83,2113.91 555.83,2161.16 2053,2413
WAKE_N: J5.4 J6.6 R10.1 | length 1581.2
  Component Side w6: v1(2271.73,1488.06) 2271.73,2077.73 2450,2256 2450,2550 J5.4
  Solder Side w6: v1(2271.73,1488.06) J6.6 ; R10.1 J5.4
WR_N: J1.4 U1.120 | length 3672
  Component Side w6: J1.4 251,559 590,559 844,305 v1(3180,305)
  Solder Side w6: v1(3180,305) 3401.78,305 3451.89,355.11 U1.120
pads on no net: J3.35 MNT1.MOUNT MNT2.MOUNT MNT3.MOUNT MNT4.MOUNT U1.37 U1.38 U1.39 U1.52 U1.53 U1.87 U1.88 U1.89 U1.90 U1.91 U1.92 U1.98 U1.99 U1.103 U1.104 U1.105 U1.106 U1.107 U1.111 U1.112 U1.113 U2.6

## Polygon pours and split planes (outlines as drawn)
V3P3 on V3P3 Plane (split plane): 100,2679.9 4600,2679.9 4600.04,2679.91 4600.07,2679.9 4600.07,2679.91 4600.14,2679.92 4600.29,2679.91 4600.36,2679.91 4600.83,2679.96 4607.91,2679.61 4615.68,2678.46 4623.29,2676.55 4630.68,2673.91 4637.78,2670.55 4644.51,2666.52 4650.82,2661.84 4656.64,2656.57 4661.91,2650.75 4666.58,2644.44 4670.62,2637.71 4673.98,2630.61 4676.62,2623.22 4678.53,2615.61 4679.68,2607.84 4680.01,2601.11 4679.9,2600 4679.9,100.01 4679.9,100 4679.96,99.37 4679.61,92.16 4678.46,84.39 4676.55,76.78 4673.91,69.39 4670.55,62.29 4666.51,55.56 4661.84,49.25 4656.57,43.43 4650.75,38.16 4644.44,33.49 4637.71,29.45 4630.61,26.09 4623.22,23.45 4615.61,21.54 4607.84,20.39 4600.63,20.03 4600,20.1 100,20.1 99.37,20.03 92.16,20.39 84.39,21.54 76.78,23.45 69.39,26.09 62.29,29.45 55.56,33.49 49.25,38.16 43.43,43.43 38.16,49.25 33.49,55.56 29.45,62.29 26.09,69.39 23.45,76.78 21.54,84.39 20.39,92.16 20.03,99.37 20.1,100 20.1,2600 20.03,2600.63 20.39,2607.84 21.54,2615.61 23.45,2623.22 26.09,2630.61 29.45,2637.71 33.49,2644.44 38.16,2650.75 43.43,2656.57 49.25,2661.84 55.56,2666.51 62.29,2670.55 69.39,2673.91 76.78,2676.55 84.39,2678.46 92.16,2679.61 99.37,2679.97
GND on Ground Plane (split plane): 100,2679.9 4600,2679.9 4600.04,2679.91 4600.07,2679.9 4600.07,2679.91 4600.14,2679.92 4600.29,2679.91 4600.36,2679.91 4600.83,2679.96 4607.91,2679.61 4615.68,2678.46 4623.29,2676.55 4630.68,2673.91 4637.78,2670.55 4644.51,2666.52 4650.82,2661.84 4656.64,2656.57 4661.91,2650.75 4666.58,2644.44 4670.62,2637.71 4673.98,2630.61 4676.62,2623.22 4678.53,2615.61 4679.68,2607.84 4680.01,2601.11 4679.9,2600 4679.9,100.01 4679.9,100 4679.96,99.37 4679.61,92.16 4678.46,84.39 4676.55,76.78 4673.91,69.39 4670.55,62.29 4666.51,55.56 4661.84,49.25 4656.57,43.43 4650.75,38.16 4644.44,33.49 4637.71,29.45 4630.61,26.09 4623.22,23.45 4615.61,21.54 4607.84,20.39 4600.63,20.03 4600,20.1 100,20.1 99.37,20.03 92.16,20.39 84.39,21.54 76.78,23.45 69.39,26.09 62.29,29.45 55.56,33.49 49.25,38.16 43.43,43.43 38.16,49.25 33.49,55.56 29.45,62.29 26.09,69.39 23.45,76.78 21.54,84.39 20.39,92.16 20.03,99.37 20.1,100 20.1,2600 20.03,2600.63 20.39,2607.84 21.54,2615.61 23.45,2623.22 26.09,2630.61 29.45,2637.71 33.49,2644.44 38.16,2650.75 43.43,2656.57 49.25,2661.84 55.56,2666.51 62.29,2670.55 69.39,2673.91 76.78,2676.55 84.39,2678.46 92.16,2679.61 99.37,2679.97

## Other copper
Solder Side:
  region net V1P2: 3270.79,1248.82 3412.52,1248.82 3431.42,1267.72 3431.42,1393.7 3440.87,1393.7 3440.87,1233.07 3459.76,1214.17 3494.41,1214.17 3525.91,1245.67 3525.91,1314.96 3535.35,1314.96 3535.35,1233.07 3554.25,1214.17 3655.05,1214.17 3683.39,1242.51 3683.39,1389.76 3692.83,1389.76 3692.83,1242.52 3721.19,1214.17 3755.82,1214.17 3809.37,1267.72 3809.37,1362.2 3818.82,1371.65 3818.82,1394.16 3837.71,1394.19 3837.71,1355.92 3818.82,1337.02 3818.82,1141.73 3837.72,1122.83 3914.83,1122.83 3943.18,1151.18 3973.15,1151.18 3973.15,1132.28 3942.28,1132.28 3923.39,1113.39 3806.22,1113.39 3787.32,1094.49 3787.32,1018.9 3825.12,981.1 3937,981.1 3937,971.65 3809.37,971.65 3787.32,949.61 3787.32,864.57 3844.02,807.87 3894.41,807.87 3929.06,842.52 3935.35,842.52 3935.35,820.46 3929.03,820.45 3907.01,798.43 3821.97,798.43 3812.52,788.98 3812.52,779.53 3875.51,716.54 4012.48,716.53 4106.5,810.55 4149.5,810.55 4149.5,689.55 4160.5,678.55 4160.5,618.55 3890.5,618.55 3834.57,674.48 3834.57,716.54 3771.57,779.53 3762.13,779.53 3740.08,757.48 3740.08,622.05 3730.63,622.05 3730.63,744.88 3699.13,776.38 3631.38,776.38 3614.1,759.09 3614.09,622.05 3604.65,622.05 3604.65,735.43 3563.7,776.38 3494.41,776.38 3472.36,754.33 3472.36,637.79 3488.11,622.05 3488.11,606.3 3475.51,606.3 3462.91,618.9 3462.91,744.88 3434.57,773.23 3381.02,773.22 3362.13,754.33 3362.13,662.99 3346.38,647.24 3346.38,628.35 3324.33,628.34 3324.33,640.95 3352.68,669.28 3352.68,732.28 3333.78,751.18 3280.24,751.18 3280.24,707.09 3261.34,707.09 3261.34,760.63 3268.82,760.63 3336.93,760.63 3349.52,773.22 3349.53,823.62 3336.15,837 3318.81,837 3311.73,829.92 3255.04,829.92 3255.04,839.37 3299.13,839.37 3349.53,889.76 3349.53,943.31 3336.93,955.91 3248.74,955.91 3248.74,965.35 3336.93,965.35 3349.53,977.95 3349.53,1006.3 3336.93,1018.9 3179.45,1018.9 3179.45,1028.35 3336.93,1028.35 3349.53,1040.95 3349.53,1053.54 3336.93,1066.14 3255.04,1066.14 3255.04,1075.59 3336.93,1075.59 3349.53,1088.19 3349.53,1116.54 3336.93,1129.13 3255.04,1129.13 3255.04,1138.58 3327.48,1138.58 3352.67,1163.77 3352.67,1195.28 3308.58,1239.37 3255.04,1239.37 3255.04,1296.06 3270.79,1296.06
  region net V1P2: 4160.5,618.55 4160.5,678.55 4149.5,689.55 4149.5,810.55 4106.5,810.55 3976.5,679.55 3890.5,679.55 3890.5,618.55
  region net V3P3: 4210.5,618.55 4404.5,618.55 4410.5,624.55 4410.5,684.55 4404.5,690.55 4278.5,690.55 4257.5,669.55 4230.5,669.55 4210.5,649.55
  region net GND: 4171.5,531.55 4171.5,572.55 4122.5,572.55 4095.5,545.55 4037.5,545.55 4037.5,596.55 4097.5,596.55 4109.5,608.55 4357.5,608.55 4365.5,600.55 4365.5,542.55 4361.5,538.55 4269.5,538.55 4234.5,573.55 4233.5,572.55 4200.5,572.55 4200.5,531.55
  region net NetL1_1: 4200.5,618.55 4200.5,649.55 4244.5,693.55 4244.5,812.55 4201.5,812.55 4201.5,689.55 4190.5,678.55 4190.5,618.55
  region net NetR3_2: 4106.5,480.55 4161.5,480.55 4161.5,435.55 4123.5,435.55 4106.5,452.55
  region net V3P3: 713.31,2095.02 555.83,2095.02 540.08,2110.76 540.08,2161.16 555.83,2176.91 571.57,2176.91 606.22,2142.26 669.21,2142.26 700.71,2110.76 713.31,2110.76
  region net GND: 722.76,2069.82 666.06,2069.82 662.91,2066.67 555.83,2066.67 540.08,2050.92 540.08,2003.68 555.83,1987.93 571.57,1987.93 599.92,2016.28 684.96,2016.28 722.76,2054.07
  region net GND: 492.13,422.47 147.53,422.47 123,447 123,467 138,482 259,482 280.73,460.27 492.13,460.27
  region net V3P3: 145,384 491.45,384 492.13,384.68 492.13,350.03 314.03,350.03 299,335 145,335
  region net V3P3: 145,1285 491.45,1285 492.13,1285.68 492.13,1251.03 314.03,1251.03 299,1236 145,1236
  region net GND: 492.13,1323.47 147.53,1323.47 123,1348 123,1368 138,1383 259,1383 280.73,1361.27 492.13,1361.27

## Silkscreen, mask and mechanical layers (free items; w line width, h text height)
Top Overlay:
  lines w10: 354.33,0 354.33,2677.17
  text ".Revision" at 230,2105 h80 r90
  text "Cospan Design" at 81,1915 h80 r90
  text "TFT PMOD" at 153.87,1915 h80 r90
  text "Rev:" at 227.07,1915 h80 r90
  text "SN:___________" at 302,1915 h80 r90
  text "C" at 272,956 h150 r90
  text "K" at 1427,726 h1500
Bottom Overlay:
  lines w6: 554,510 555,511 555,932 ; 555,1411 555,1832 ; 370,510 725,510 725,932 370,932 370,510 ; 370,1410 370,1832 725,1832 737,1832 750,1819 750,1769 725,1744 725,1410 370,1410
  text "Reference Only" at 2177,2642 h30 r90
  text "Capacitive Touch" at 3495,2586.67 h40
  text "Resistive Touch" at 1143,2580.01 h40
  text "WK_N" at 2512.5,2510 h30 r90
  text "INT_N" at 2613.33,2510 h30 r90
  text "SDA" at 2714.16,2510 h30 r90
  text "SCL" at 2815,2510 h30 r90
  text "V3P3" at 2252,2504 h30 r90
  text "INT_N" at 1326,2501.14 h30 r90
  text "TR" at 1515,2501.14 h30 r90
  text "TD" at 1615,2501.14 h30 r90
  text "TL" at 1715,2501.14 h30 r90
  text "TU" at 1815,2501.14 h30 r90
  text "G" at 2419,2459 h100
  text "G" at 1435,2439 h100
  text "D4" at 530,1745 h30
  text "D3" at 706,1745 h30
  text "D1" at 530,1645 h30
  text "D2" at 706,1645 h30
  text "D5" at 530,1545 h30
  text "D0" at 706,1545 h30
  text "D7" at 530,1445 h30
  text "D6" at 706,1445 h30
  text "G" at 707.08,1311 h100
  text "V3P3" at 706,1243 h30
  text "CS_N" at 530,844 h30
  text "SCL" at 706,839 h30
  text "DC" at 530,740.67 h30
  text "SDA" at 706,740.67 h30
  text "RST_N" at 530,647.34 h30
  text "RD_N" at 706,647.34 h30
  text "WR_N" at 706,546.5 h30
  text "TE" at 530,544 h30
  text "G" at 707.08,412.5 h100
  text "V3P3" at 706,343 h30
Mechanical 2:
  lines w39.37: 4600,2700 100,2700 ccw(c100,2600) 0,2600 0,100 ccw(c100,100) 100,0 4600,0 ccw(c4600,100) 4700,100 4700,2600 ; 4600.07,2700 cw(c4600.07,2600) 4700.07,2600